# Altium PCB SchematicBKP.PcbDoc (part 1 of 2)
Units mm, origin at the board's own origin, x right, y up, seen from the top; angles counter-clockwise.
Board outline 121.41 x 45.21 mm, 2 copper layers (Top Layer, Bottom Layer); 55 components, 98 nets, 201 pads, 241 vias.
Unrouted connection lines stored in the file: 65.
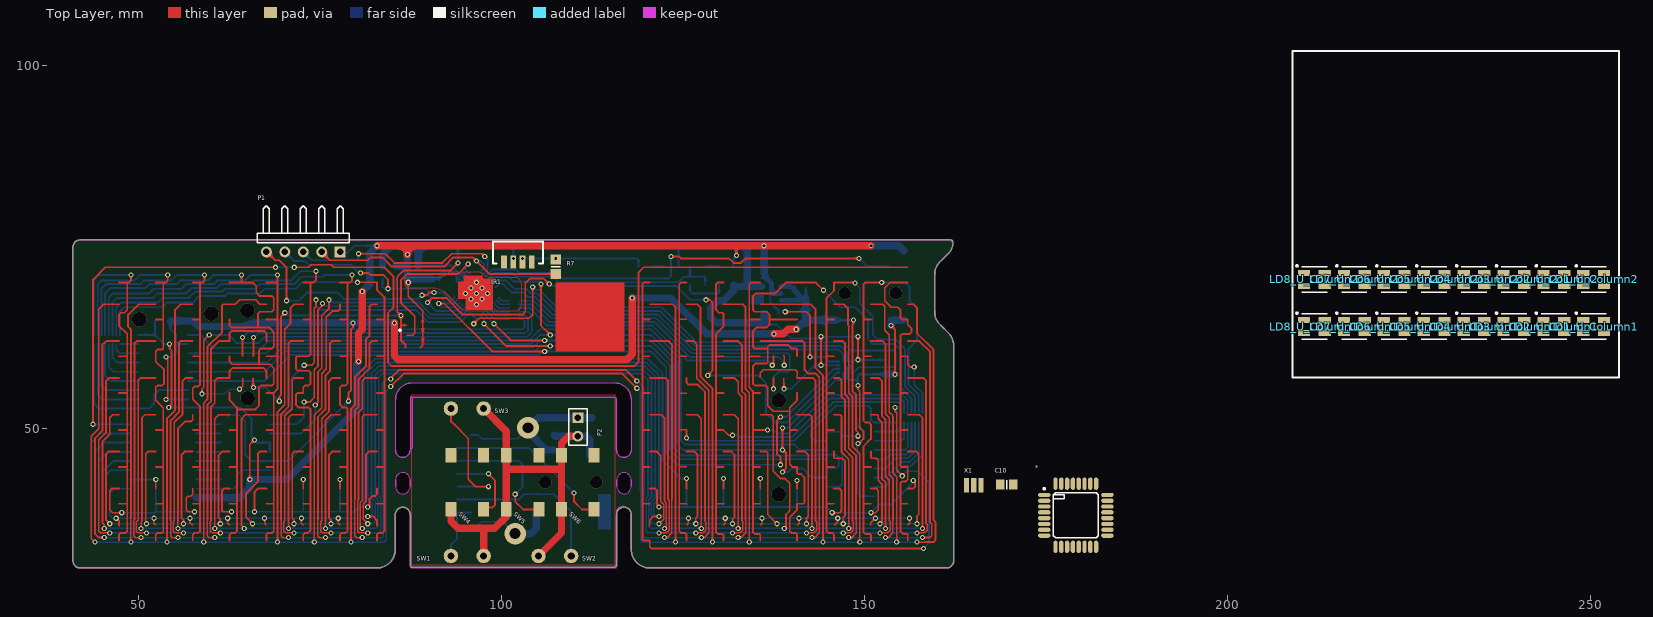
[diagram p0: Top Layer view]
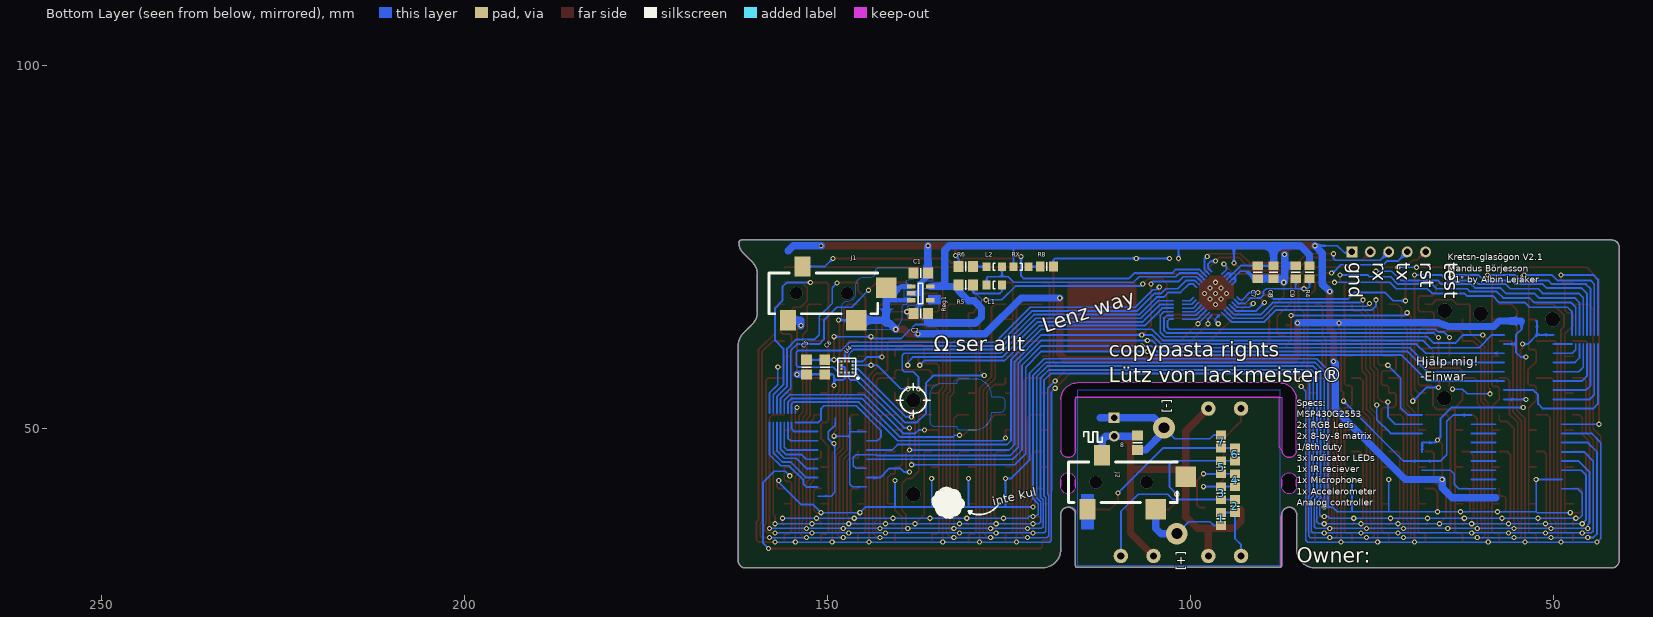
[diagram p1: Bottom Layer view, seen from below]

## Layer stack, top to bottom
Top Solder: solder mask 0.0102, Solder Resist, Dk 3.5
Top Layer: signal copper 0.0356
Dielectric 1: dielectric 0.32, FR-4, Dk 4.8
Bottom Layer: signal copper 0.0356
Bottom Solder: solder mask 0.0102, Solder Resist, Dk 3.5

## Board outline
43.434,75.946 42.672,75.946 41.91,75.946 ccw(c41.91,74.93) 40.894,74.93 40.894,31.75 ccw(c41.91,31.75) 41.91,30.734 82.804,30.734 ccw(c82.804,33.274) 85.344,33.274 85.344,34.036 85.344,38.084 cw(c86.36,38.084) 86.36,39.1 cw(c86.36,38.084) 87.376,38.084 87.376,35.56 87.376,31.099 ccw(c87.63,31.099) 87.63,30.845 115.554,30.845 ccw(c115.554,31.115) 115.824,31.115 115.824,38.1 cw(c116.832,38.1) 116.832,39.108 cw(c116.832,38.084) 117.856,38.084 117.856,37.338 117.856,33.385 117.856,33.274 ccw(c120.396,33.274) 120.396,30.734 120.65,30.734 161.29,30.734 ccw(c161.29,31.75) 162.306,31.75 162.306,61.33 ccw(c159.766,61.33) 161.562,63.126 160.578,64.111 160.399,64.29 cw(c162.195,66.086) 159.655,66.086 159.655,68.596 159.655,71.133 cw(c162.195,71.133) 160.399,72.929 160.846,73.376 161.59,74.12 ccw(c160.129,75.581) 162.195,75.581 ccw(c161.829,75.581) 161.829,75.946 161.544,75.946
cut-out: 85.364,41.97 ccw(c86.372,41.97) 87.38,41.97 87.372,42.866 ccw(c86.372,42.866) 85.371,42.866
cut-out: 85.36,46.974 85.36,53.959 cw(c87.63,53.959) 87.63,56.23 115.586,56.23 cw(c115.586,53.959) 117.856,53.959 117.856,46.974 cw(c116.84,46.974) 115.824,46.974 115.824,53.959 ccw(c115.562,53.967) 115.57,54.229 87.36,54.229 87.36,46.974 cw(c86.36,46.974)
cut-out: 115.844,41.97 ccw(c116.852,41.97) 117.86,41.97 117.852,42.866 ccw(c116.852,42.866) 115.851,42.866

## Design rules (kind name [scope] priority, off if disabled: settings)
Clearance [All] p1: gap=0.178 ignorepadtopadclearanceinfootprint=FALSE except(0: Arc-Hole Track-Hole SMDPad-Hole THPad-Hole Via-Hole Fill-Hole Poly-Hole Region-Hole Text-Hole; 0.406: Arc-Poly Track-Poly SMDPad-Poly THPad-Poly Via-Poly Fill-Poly Poly-Poly)
FanoutControl Fanout_Default [All] p1: bgadir=Out bgaviamode=Centered fanoutstyle=Auto fanoutdirection=Alternating viagrid=0.025 // Fanout_Default (Default Rule)
FanoutControl Fanout_Small [(CompPinCount < 5)] p2: bgadir=Out bgaviamode=Centered fanoutstyle=Auto fanoutdirection=OutThenIn viagrid=0.025 // Fanout_Small (Default Rule)
FanoutControl Fanout_LCC [IsLCC] p4: bgadir=Out bgaviamode=Centered fanoutstyle=Auto fanoutdirection=Alternating viagrid=0.025 // Fanout_LCC (Default Rule)
FanoutControl Fanout_BGA [IsBGA] p5: bgadir=Out bgaviamode=Centered fanoutstyle=Auto fanoutdirection=Alternating viagrid=0.025 // Fanout_BGA (Default Rule)
PolygonConnect [All] p1: connectstyle=Relief reliefconductorwidth=0.254 reliefentries=4 polygonreliefangle="90 Angle" airgapwidth=0.254
RoomDefinition U_Column8 [InComponentClass('U_Column8')] p1: confinementstyle=ConfineIn formatcopy=TRUE lockcomponents=FALSE outline 88.367,0 139.167,0 139.167,25.4 88.367,25.4
RoomDefinition U_Column7 [InComponentClass('U_Column7')] p2: confinementstyle=ConfineIn formatcopy=TRUE lockcomponents=FALSE outline 0,65.126 50.8,65.126 50.8,90.526 0,90.526
RoomDefinition U_Column6 [InComponentClass('U_Column6')] p3: confinementstyle=ConfineIn formatcopy=TRUE lockcomponents=FALSE outline 0,37.791 50.8,37.791 50.8,63.191 0,63.191
RoomDefinition U_Column5 [InComponentClass('U_Column5')] p4: confinementstyle=ConfineIn formatcopy=TRUE lockcomponents=FALSE outline 0,95.479 50.8,95.479 50.8,120.879 0,120.879
RoomDefinition U_Column4 [InComponentClass('U_Column4')] p5: confinementstyle=ConfineIn formatcopy=TRUE lockcomponents=FALSE outline 0.076,124.257 50.876,124.257 50.876,149.657 0.076,149.657
RoomDefinition U_Column3 [InComponentClass('U_Column3')] p6: confinementstyle=ConfineIn formatcopy=TRUE lockcomponents=FALSE outline 59.055,124.282 109.855,124.282 109.855,149.682 59.055,149.682
RoomDefinition U_Column2 [InComponentClass('U_Column2')] p7: confinementstyle=ConfineIn formatcopy=TRUE lockcomponents=FALSE outline 209,66.5 253.5,66.5 253.5,72.786 209,72.786
RoomDefinition U_Column1 [InComponentClass('U_Column1')] p8: confinementstyle=ConfineIn formatcopy=TRUE lockcomponents=FALSE outline 209,61.5 253.5,61.5 253.5,66.5 209,66.5
RoutingVias [All] p1: holewidth=0.4 width=0.61 viastyle="Through Hole" minholewidth=0.3 minwidth=0.457 maxholewidth=3 maxwidth=3
SilkToSilkClearance [All] p1 off: silktosilkclearance=0.254
SilkToSolderMaskClearance [IsPad] p1 off: minsilkscreentomaskgap=0.254 clearancetoexposedcopper=TRUE
SolderMaskExpansion [All] p1: expansion=0.102
Width [All] p1: maxlimit=1.016 minlimit=0.178 preferedwidth=0.254
24 further rules are at their usual default settings.

## Classes and differential pairs
component class U_Column2: LD1_U_Column2 LD2_U_Column2 LD3_U_Column2 LD4_U_Column2 LD5_U_Column2 LD6_U_Column2 LD7_U_Column2 LD8_U_Column2
component class U_Column1: LD1_U_Column1 LD2_U_Column1 LD3_U_Column1 LD4_U_Column1 LD5_U_Column1 LD6_U_Column1 LD7_U_Column1 LD8_U_Column1
component class U_Controller: 1 2 3 4 5 6 7 8 J2 P2 SW1 SW2 SW3 SW4 SW5 SW6
component class U_MSP430G2553: * C1 C2 C7 C8 C9 C10 IR1 L1 L2 P1 R4 R5 R6 R7 R8 Reg1 RX X1
component class main: Acc1 C5 C6 J1 U4
channel class Column: Col1 Col2 Col3 Col4 Col5 Col6 Col7 Col8 Col9 Col10 Col11 Col12 Col13 Col14 Col15 Col16

## Components (designator, comment, footprint, x,y, rotation, side; value= is the part's Value field where it differs from the comment)
1 "Res1" 6-0805_N 95.758,37.491 r270 bottom value=1K
2 "Res1" 6-0805_N 93.853,39.269 r270 bottom value=1K
3 "Res1" 6-0805_N 95.758,41.047 r270 bottom value=1K
4 "Res1" 6-0805_N 93.853,42.825 r270 bottom value=1K
5 "Res1" 6-0805_N 95.758,44.603 r270 bottom value=1K
6 "Res1" 6-0805_N 93.853,46.381 r90 bottom value=1K
7 "Res1" 6-0805_N 95.758,48.159 r270 bottom value=1K
8 "Res1" 6-0805_M 107.25,48 r270 bottom value=1M
* "ATmega328" TQFP32 179.121,37.998 r0 top
C1 "Cap" 6-0805_M 137.16,71.374 r0 bottom locked value=1uF
C2 "Cap" 6-0805_M 137.16,65.786 r0 bottom locked value=1uF
C5 "Cap" 6-0805_M 152.908,58.42 r90 bottom locked value=100nF
C6 "Cap" 6-0805_M 150.368,58.42 r90 bottom locked value=100nF
C7 "Cap" 6-0805_N 90.703,71.501 r270 bottom value=10uF
C8 "Cap" 6-0805_N 88.519,71.501 r270 bottom value=100nF
C9 "Cap" 6-0805_N 85.471,71.501 r270 bottom value=1nF
C10 "Cap" 6-0805_N 169.596,42.215 r0 top value=100nF
IR1 "IR Reciever" "IR smd - duplicate" 100.33,72.898 r0 top
J1 "3.5mm Jack" PHONEJACK 154.305,68.58 r180 bottom locked
J2 "3.5mm Jack" PHONEJACK 113.03,42.545 r180 bottom
L1 "150080RS75000" 0805_A 127,69.723 r180 bottom
L2 "150080RS75000" 0805_A 127,72.263 r180 bottom
LD1_U_Column1 "WS2812" WS2812B-Mini 250.5,64 r0 top (schematic designator LD1)
LD1_U_Column2 "WS2812" WS2812B-Mini 250.5,70.5 r0 top (schematic designator LD1)
LD2_U_Column1 "WS2812" WS2812B-Mini 245,64 r0 top (schematic designator LD2)
LD2_U_Column2 "WS2812" WS2812B-Mini 245,70.5 r0 top (schematic designator LD2)
LD3_U_Column1 "WS2812" WS2812B-Mini 239.5,64 r0 top (schematic designator LD3)
LD3_U_Column2 "WS2812" WS2812B-Mini 239.5,70.5 r0 top (schematic designator LD3)
LD4_U_Column1 "WS2812" WS2812B-Mini 234,64 r0 top (schematic designator LD4)
LD4_U_Column2 "WS2812" WS2812B-Mini 234,70.5 r0 top (schematic designator LD4)
LD5_U_Column1 "WS2812" WS2812B-Mini 228.5,64 r0 top (schematic designator LD5)
LD5_U_Column2 "WS2812" WS2812B-Mini 228.5,70.5 r0 top (schematic designator LD5)
LD6_U_Column1 "WS2812" WS2812B-Mini 223,64 r0 top (schematic designator LD6)
LD6_U_Column2 "WS2812" WS2812B-Mini 223,70.5 r0 top (schematic designator LD6)
LD7_U_Column1 "WS2812" WS2812B-Mini 217.5,64 r0 top (schematic designator LD7)
LD7_U_Column2 "WS2812" WS2812B-Mini 217.5,70.5 r0 top (schematic designator LD7)
LD8_U_Column1 "WS2812" WS2812B-Mini 212,64 r0 top (schematic designator LD8)
LD8_U_Column2 "WS2812" WS2812B-Mini 212,70.5 r0 top (schematic designator LD8)
P1 "Header 5H" HDR1X5H 77.724,74.295 r180 top locked
P2 "Header 2" HDR1X2 110.49,51.435 r270 top
R4 "Res1" 6-0805_N 83.566,71.501 r90 bottom value=47k
R5 "Res1" 6-0805_M 130.937,69.723 r0 bottom value=1K
R6 "Res1" 6-0805_M 130.937,72.263 r180 bottom value=1K
R7 "Res1" 6-0805_M 107.442,72.263 r270 top value=1K
R8 "Res1" 6-0805_N 119.761,72.263 r0 bottom value=1K
Reg1 "ADP122" SOP5 137.16,68.58 r180 bottom locked
RX "150080RS75000" 0805_A 123.317,72.263 r0 bottom
SW1 "Vertical switch" Btn_Vert 95.25,32.385 r0 top
SW2 "Vertical switch" Btn_Vert 107.315,32.385 r0 top
SW3 "Vertical switch" Btn_Vert 95.25,52.705 r180 top
SW4 "Horizontal button" Btn_Horiz 95.25,42.545 r270 top
SW5 "Horizontal button" Btn_Horiz 102.87,42.545 r270 top
SW6 "Horizontal button" Btn_Horiz 110.49,42.545 r270 top
U4 "BMA253" BMA253 147.32,58.42 r0 bottom locked
X1 "16MHz" osc 165.049,42.113 r0 top

## Footprints (in the part's own frame and the unit in brackets; to place one, negate y for a bottom-side part, rotate by r counter-clockwise, add the part's x,y. Pads: shape width x height; smd on the part's side, far side on the other; paste and mask are expansions set on the pad)
6-0805_M [mm] "Chip Resistor, Body 2.0x1.2mm, IPC Low Density"
  rect 1.4x1.5 smd: 1(-1,0) 2(1,0)
  silkscreen extent 0,-0.65 0,0.65, body extent -1.07,-0.7 1.07,0.7, height 0.7
6-0805_N [mm] "Chip Resistor, Body 2.0x1.2mm, IPC Medium Density"
  rect 1.2x1.4 smd: 1(-0.9,0) 2(0.9,0)
  silkscreen extent 0,-0.6 0,0.6, body extent -1.07,-0.7 1.07,0.7, height 0.7
0805_A [mm] "Chip LED, 2-Leads, Body 2.0x1.3mm, IPC Medium Density"
  rect 1.1x1.2 smd: 1(-1.05,0) 2(1.05,0)
  silkscreen extent -0.15,-0.5 0.15,0.5, body extent -1,-0.62 1,0.62, height 0.68
BMA253 [mm]
  rect 0.3x0.3 smd mask+0.051: 1(-0.75,0.75) 2(-0.75,0.25) 3(-0.75,-0.25) 4(-0.75,-0.75) 5(-0.25,-0.75) 6(0.25,-0.75) 7(0.75,-0.75) 8(0.75,-0.25) 9(0.75,0.25) 10(0.75,0.75) 11(0.25,0.75) 12(-0.25,0.75)
  silkscreen extent -1.65,-1.25 1.25,1.65, body extent -1.03,-1.03 1.03,1.03, height 1.2
Btn_Horiz [mm] "Horizontal 6x6mm SMD Button"
  rect 2x1.5 smd: 1(-3.75,2.25) 2(3.75,2.25) 3(-3.75,-2.25) 4(3.75,-2.25)
  body extent -4,-3 4,3, height 4.5
Btn_Vert [mm] "Vertical 6x6mm button"
  round 2 hole 1: 0(-2.25,0) 1(2.25,0)
  body extent -3,-3.5 3,0.75, height 6
HDR1X2 [mm] "Connector; Header; 2 Position"
  rect 1.5x1.5 hole 0.9: 1(0,0)
  round 1.5 hole 0.9: 2(2.54,0)
  silkscreen extent -1.27,-1.27 3.81,1.27
HDR1X5H [mm] "Connector; Header; 5 Position; Right Angle"
  rect 1.5x1.5 hole 0.9: 1(0,0)
  round 1.5 hole 0.9: 2(2.54,0) 3(5.08,0) 4(7.62,0) 5(10.16,0)
  silkscreen extent -1.27,-6.35 11.43,-1.27
"IR smd - duplicate" [mm] "TSOP77238TR"
  rect 0.8x1.8 smd: 1(0,0) 2(1.27,0) 3(2.54,0) 4(3.81,0)
  silkscreen extent -1.52,-0.21 5.33,2.84, body extent -1.5,-0.2 5.3,2.8, height 3.2
osc [mm]
  rrect0% 0.7x2 smd: GND(0,0) OSCI(1,0) OSCO(-1,0)
PHONEJACK [mil] "3.5mm phone jack"
  rect 88x110 smd: 1(-44,-146)
  rect 110x110 smd: 2(326,-146) 4(488,30)
  rect 87x110 smd: 3(35,146)
  silkscreen extent -148,-110 442,110, body extent -237,-167 508,166, height 200
SOP5 [mm]
  rect 1.2x0.6 smd: 1(-1.31,0.95) 2(-1.31,0) 3(-1.31,-0.95) 4(1.31,-0.95) 5(1.31,0.95)
  silkscreen extent -0.3,-1.43 0.3,1.43
TQFP32 [mm] "CQFP, 32-Leads, Body 9,00x9,00mm, Pitch 0,80mm, IPC Low Density"
  oval 1.7x0.6 smd: 1(-4.35,2.8) 2(-4.35,2) 3(-4.35,1.2) 4(-4.35,0.4) 5(-4.35,-0.4) 6(-4.35,-1.2) 7(-4.35,-2) 8(-4.35,-2.8) 17(4.35,-2.8) 18(4.35,-2) 19(4.35,-1.2) 20(4.35,-0.4) 21(4.35,0.4) 22(4.35,1.2) 23(4.35,2) 24(4.35,2.8)
  oval 0.6x1.7 smd: 9(-2.8,-4.35) 10(-2,-4.35) 11(-1.2,-4.35) 12(-0.4,-4.35) 13(0.4,-4.35) 14(1.2,-4.35) 15(2,-4.35) 16(2.8,-4.35) 25(2.8,4.35) 26(2,4.35) 27(1.2,4.35) 28(0.4,4.35) 29(-0.4,4.35) 30(-1.2,4.35) 31(-2,4.35) 32(-2.8,4.35)
  silkscreen extent -4.47,-3.1 3.1,3.77, body extent -4.62,-4.62 4.62,4.62, height 1.15
WS2812B-Mini [mm]
  rect 1.7x0.85 smd: 1(-1.425,0.89) 2(-1.425,-0.89) 3(1.425,-0.89) 4(1.425,0.89)
  silkscreen extent -2.52,-1.75 1.75,1.99, body extent -1.96,-1.74 1.96,1.74, height 1.95

## Part data
1 2 3 4 5 6 7 8 R4 R5 R6 R7 R8: "Resistor", LatestRevisionDate=17-Jul-2002, LatestRevisionNote="Re-released for DXP Platform.", PackageDescription="Axial Device, Thru-Hole; 2 Leads; 0.3 in Pin Spacing", PackageReference=AXIAL-0.3, Published=8-Jun-2000, Publisher="Altium Limited"
C1 C2 C5 C6 C7 C8 C9 C10: "Capacitor", LatestRevisionDate=17-Jul-2002, LatestRevisionNote="Re-released for DXP Platform.", PackageDescription="Radial Cap, Thru-Hole; 2 Leads; 0.3 in Pin Spacing", PackageReference=RAD-0.3, Published=8-Jun-2000, Publisher="Altium Limited"
IR1: library part Component_1, "38kHz Infrared reciever module", manufacturer part nr=TSOP77238TR, Supplier Part Number 1=78-TSOP77238TR, Supplier 1=Mouser
J1 J2: library part Phonejack
L1 L2 RX: "SMD mono-color Chip LED, WL-SMCW, Red", Color=Red, ComponentLink1Description="Manufacturer URL", ComponentLink1URL=http://www.we-online.com, ComponentLink2Description=Datasheet, ComponentLink2URL=http://katalog.we-online.com/led/datasheet/150080RS75000.pdf, PackageReference=0805_A, PartNumber=150080RS75000
P1: "Header, 5-Pin, Right Angle", LatestRevisionDate=17-Jul-2002, LatestRevisionNote="Re-released for DXP Platform.", Publisher="Altium Limited"
P2: "Header, 2-Pin", LatestRevisionDate=17-Jul-2002, LatestRevisionNote="Re-released for DXP Platform.", Publisher="Altium Limited"
Reg1: library part REG, "LD59030DTPU33R 3.3V regulator"
SW1 SW2 SW3: library part SWVERT
SW4 SW5 SW6: library part HORIZBTN
U4: library part ACCELEROMETER, "accelerometer"
X1: library part xtal_1, "CSTCE16M0V53-R0"

## Via types
v1: diameter 0.711, hole 0.4, Top Layer to Bottom Layer, 189 vias
v2: diameter 0.711, hole 0.4, Top Layer to Bottom Layer, tented bottom, 28 vias
v3: diameter 0.711, hole 0.4, Top Layer to Bottom Layer, tented top, 10 vias
v4: diameter 2, hole 2, Top Layer to Bottom Layer, 6 vias
v5: diameter 1.702, hole 1.702, Top Layer to Bottom Layer, 4 vias
v6: diameter 3, hole 1.5, Top Layer to Bottom Layer, 2 vias
v7: diameter 0.711, hole 0.4, Top Layer to Bottom Layer, tented both sides, 1 vias
v8: diameter 0.61, hole 0.4, Top Layer to Bottom Layer, 1 vias

## Nets (pads, with @x,y where several pads share a name; then routed paths per layer and width w, separated by ;. In a path a pad name is that pad's centre, name@x,y a point inside that pad or via, vN(x,y) a via of type N, cw(c..) or ccw(c..) an arc to the next point about the centre after c; other vN are vias at no path point)
3.3V: C2.1 C5.2 C6.2 IR1.2 Reg1.5 U4.3 U4.7 | length 188.1
  Top Layer w0.178: 138.883,56.87 v2(138.883,55.427) v2@138.938,55.372
  Top Layer w0.254: 65.732,56.87 65.732,55.68 v1(65.786,55.626) ; v1(69.342,53.721) 69.342,54.356 69.596,54.61 69.596,65.405 v1(70.104,65.913) ; 86.757,61.087 86.757,61.452 86.106,62.103 86.106,64.135 ; 86.919,64.186 86.157,64.186 86.106,64.135 ; v1(93.98,72.771) 92.964,71.755 86.487,71.755 85.598,70.866 85.598,66.04 v1(86.106,65.532) 86.106,64.135 ; IR1.2@101.6,72.898 IR1.2@101.6,73.463 ; v1(144.018,58.674) v1(144.018,62.611) ; v1(149.098,59.436) v1(149.098,62.611)
  Bottom Layer w0.254: v1(65.786,55.626) 67.437,55.626 v1(69.342,53.721) ; v1(70.104,65.913) 70.485,65.532 v1(86.106,65.532) ; 90.703,72.401 93.053,72.401 94.361,71.093 ; v1(93.98,72.771) 93.98,75.149 ; 94.947,70.507 94.361,71.093 ; 95.3,70.86 94.787,71.374 94.642,71.374 94.361,71.093 ; v1(101.6,73.406) 101.6,75.133 101.608,75.141 101.6,75.149 ; 124.367,72.263 124.367,75.115 ; C2.1@136.16,65.786 136.16,64.576 136.449,64.287 137.897,64.287 139.827,62.357 143.764,62.357 v1(144.018,62.611) v1(149.098,62.611) ; v2(138.883,55.427) 139.882,55.427 143.125,58.67 v1@143.891,58.67 ; v1(144.018,58.674) 143.895,58.674 v1@143.891,58.67 ; U4.3@146.57,58.67 v1@143.891,58.67 ; U4.7@148.07,59.17 148.451,59.17 148.701,59.42 v1@149.098,59.42 ; v1(149.098,59.436) v1@149.098,59.42 ; C5.2@152.908,59.42 C6.2@150.368,59.42 v1@149.098,59.42
  Bottom Layer w0.356: 88.519,72.401 90.703,72.401
  Bottom Layer w1.016: 83.566,72.401 83.566,73.914 84.801,75.149 93.98,75.149 101.6,75.149 133.223,75.149 133.858,74.514 133.858,69.85 134.178,69.53 ; 88.519,72.401 88.519,75.149 ; Reg1.5@135.85,69.53 134.178,69.53 ; C2.1@136.16,65.786 136.16,64.516 129.54,64.516 128.778,65.278 128.778,66.548 129.794,67.564 130.556,67.564 131.937,68.945 131.937,69.723 132.13,69.53 134.178,69.53
5V: C1.2 J1.2 J1.4 Reg1.1 Reg1.3 | length 209.7
  Top Layer w0.254: v1(53.721,53.975) 53.975,54.229 53.975,59.563 v1(53.721,59.817) ; v2(78.867,53.721) 78.867,54.864 79.248,55.245 79.248,63.627 79.502,63.881 v1(79.502,64.516) ; v1(148.463,64.897) 148.463,64.389 148.336,64.262 148.336,55.118 148.844,54.61 148.844,49.657 149.098,49.403 v1(149.098,48.895)
  Top Layer w1.016: v1(85.217,64.516) 85.217,59.944 85.725,59.436 117.221,59.436 117.983,60.198 v1(117.983,67.945) ; v1(137.541,62.992) 138.811,62.992 139.446,63.627 v1(140.589,63.627)
  Bottom Layer w0.178: 144.555,41.91 146.558,41.91 146.939,42.291 146.939,48.895 ; 144.555,49.53 146.939,49.53 ; 146.955,51.435 146.955,49.546 146.939,49.53 ; v1(149.098,48.895) 146.939,48.895 ; 146.939,48.895 146.939,49.53
  Bottom Layer w0.254: v1(53.721,53.975) 56.74,53.975 ; v1(53.721,59.817) 54.483,59.817 55.118,60.452 55.118,61.595 ; 54.34,64.77 54.34,63.643 55.118,62.865 55.118,61.595 ; 56.74,61.595 55.118,61.595 ; 61.243,51.816 63.754,51.816 64.643,50.927 64.643,46.355 65.532,45.466 68.043,45.466 70.612,45.466 v2(78.867,53.721) ; 141.91,67.818 J1.4@141.91,69.342 ; J1.2@146.025,64.897 146.05,64.897 v1(148.463,64.897)
  Bottom Layer w0.66: Reg1.3@138.47,67.63 141.722,67.63 ; Reg1.1@138.47,69.53 139.822,69.53 141.722,67.63 ; 141.91,67.818 141.722,67.63
  Bottom Layer w1.016: 54.34,64.77 57.404,64.77 58.166,64.008 64.389,64.008 65.087,64.262 65.786,64.516 v1(79.502,64.516) v1(85.217,64.516) ; v1(117.983,67.945) 123.317,67.945 128.27,62.992 v1(137.541,62.992) ; v1(140.589,63.627) 141.402,64.44 141.91,64.44 ; 141.91,67.818 141.91,64.44 ; J1.2@146.05,64.897 J1.2@146.025,64.872 142.342,64.872 141.91,64.44
+5: *.4 *.6 C7.1 C8.1 LD1_U_Column1.1 LD1_U_Column2.1 LD2_U_Column1.1 LD2_U_Column2.1 LD3_U_Column1.1 LD3_U_Column2.1 LD4_U_Column1.1 LD4_U_Column2.1 LD5_U_Column1.1 LD5_U_Column2.1 LD6_U_Column1.1 LD6_U_Column2.1 LD7_U_Column1.1 LD7_U_Column2.1 LD8_U_Column1.1 LD8_U_Column2.1 R4.2 R5.2 RX.2
A_BTN: *.23 J1.3 | length 60.5
  Top Layer w0.254: v1(123.317,73.66) 124.46,73.66 124.714,73.406 131.318,73.406 131.953,72.771 132.969,72.771 133.604,73.406 v1(149.225,73.406)
  Bottom Layer w0.254: 97.74,70.86 98.761,71.882 101.981,71.882 102.489,71.374 107.696,71.374 108.458,70.612 122.936,70.612 123.317,70.993 v1(123.317,73.66) ; v1(149.225,73.406) 150.343,72.288 J1.3@153.416,72.288
BAT+: 1.2 J2.2 | length 12.9
  Bottom Layer w0.254: 1.2@95.758,36.591 96.763,36.591 97.282,37.11 100.203,37.11 v6(101.854,35.459)
  Bottom Layer w1.016: v6(101.854,35.459) 104.039,35.459 104.75,36.17 J2.2@104.75,38.837
BAT-: 7.1 8.2 J2.1 P2.1 | length 23.3
  Bottom Layer w0.254: 7.1@95.758,49.059 96.763,49.059 97.282,48.54 102.108,48.54 v6(103.632,50.064)
  Bottom Layer w1.016: 8.2@107.25,47 106.129,47 103.632,49.497 v6(103.632,50.064) 105.003,51.435 P2.1@110.49,51.435 112.395,51.435
CLK: U4.12 | length 136.9
  Top Layer w0.254: v3(105.41,69.85) 105.41,64.135 v3(106.68,62.865) ; v1(138.684,43.942) 139.192,44.45 139.192,46.609 138.811,46.99 v1(138.684,46.99) v1(138.684,50.038)
  Bottom Layer w0.254: 56.74,60.325 67.564,60.325 68.834,61.595 104.013,61.595 105.283,62.865 v3(106.68,62.865) 120.523,62.865 124.206,59.182 124.206,47.752 124.968,46.99 v1(138.684,46.99) ; 98.447,70.153 99.16,70.866 100.965,70.866 101.6,70.231 105.156,70.231 105.537,69.85 v3(105.41,69.85) ; v1(138.684,43.942) 139.446,43.942 139.954,44.45 141.478,44.45 142.748,43.18 144.555,43.18 ; v1(138.684,50.038) 139.446,50.038 146.05,56.642 146.812,56.642 147.07,56.9 U4.12@147.07,57.67
CS_ACCL: U4.10 | length 76.2
  Top Layer w0.254: v3(96.139,64.389) 96.901,65.151 103.759,65.151 104.267,65.659 v3(104.267,69.469)
  Bottom Layer w0.178: U4.10@148.07,57.67 148.475,57.67 149.225,58.42 154.051,58.42
  Bottom Layer w0.254: 96.007,65.592 96.52,65.08 96.52,64.77 v3(96.139,64.389) ; v3(104.267,69.469) 104.648,69.088 105.156,69.088 107.569,66.675 122.047,66.675 126.873,61.849 146.939,61.849 148.082,60.706 154.051,60.706 154.305,60.452 154.305,58.674 154.051,58.42
GND: *.3 *.5 *.21 C1.1 C2.2 C5.1 C6.1 C7.2 C8.2 C9.1 C10.2 IR1.1 J1.1 LD1_U_Column1.3 LD1_U_Column2.3 LD2_U_Column1.3 LD2_U_Column2.3 LD3_U_Column1.3 LD3_U_Column2.3 LD4_U_Column1.3 LD4_U_Column2.3 LD5_U_Column1.3 LD5_U_Column2.3 LD6_U_Column1.3 LD6_U_Column2.3 LD7_U_Column1.3 LD7_U_Column2.3 LD8_U_Column1.3 LD8_U_Column2.3 P1.1 R6.1 Reg1.2 U4.4 U4.8 U4.9 U4.11 X1.GND | length 267
  Top Layer w0.254: v1(54.102,52.832) 54.483,53.213 54.483,60.706 54.229,60.96 v1(54.229,61.595) ; v1(65.278,42.926) 65.278,47.752 v1(65.913,48.387) ; v1(87.122,70.104) 87.122,68.199 89.103,66.218 89.103,64.186 89.103,62.814 89.103,61.433 88.757,61.087 ; v1(132.334,73.787) 132.334,75.149 ; v1(139.065,66.04) 141.986,66.04 142.494,65.532 v1(142.494,59.817) ; v1(149.098,47.879) 149.225,47.879 149.86,48.514 149.86,49.555 149.352,50.063 149.352,55.118 149.098,55.372 v1(149.098,55.88) ; v1(153.67,64.135) 154.178,63.627 v1(154.178,57.404)
  Top Layer w1.016: v1(80.264,59.182) 80.264,63.119 80.772,63.627 v1(80.772,68.834) ; v1(82.804,75.149) 86.995,75.149 ; v1(86.995,73.914) 86.995,75.149 ; v8(150.876,75.149) v1(136.144,75.149) 132.334,75.149 86.995,75.149
  Bottom Layer w0.178: 148.955,51.435 148.955,50.435 149.86,49.53 149.86,48.514 149.225,47.879 v1(149.098,47.879) ; v1@148.971,47.752 148.971,41.148 149.479,40.64 151.355,40.64
  Bottom Layer w0.254: 49.94,62.865 52.212,62.865 ; 52.34,64.77 52.212,64.77 52.212,62.865 ; v1(54.102,52.832) 64.008,52.832 65.532,51.308 65.532,48.768 v1(65.913,48.387) 66.294,48.006 68.043,48.006 68.043,46.736 ; v1(54.229,61.595) 53.482,61.595 52.212,62.865 ; P1.1@77.724,74.168 78.74,74.168 79.721,75.149 v1(82.804,75.149) ; C7.2@90.424,70.601 C7.2@91.175,70.601 ; 92.126,71.476 92.278,71.628 93.118,71.628 93.98,70.766 ; 94.24,69.8 93.726,70.313 93.726,70.512 93.98,70.766 ; 94.593,70.153 93.98,70.766 ; R6.1@131.937,72.263 131.937,73.39 v1(132.334,73.787) ; C1.1@136.16,70.977 C1.1@136.16,71.374 ; 137.16,68.58 136.998,68.418 136.998,67.345 138.16,66.183 C2.2@138.16,65.786 ; v1(142.494,59.817) 144.526,59.817 145.173,59.17 U4.4@146.57,59.17 ; U4.9@148.07,58.17 148.07,58.42 ; U4.8@148.07,58.67 148.07,58.42 ; v1(149.098,55.88) 149.098,56.642 ; C5.1@152.908,57.42 C6.1@150.368,57.42 149.241,57.42 149.098,57.277 149.098,56.642 ; v1@154.162,57.42 v1(154.178,57.404) ; 148.07,58.42 148.066,58.416 147.57,58.416 U4.11@147.57,57.67 147.57,56.9 147.828,56.642 149.098,56.642
  Bottom Layer w0.508: C7.2@91.175,70.601 92.05,71.476 92.126,71.476
  Bottom Layer w0.66: C1.1@136.16,70.977 137.16,69.977 137.16,68.58 Reg1.2@138.47,68.58
  Bottom Layer w1.016: 57.89,40.386 63.881,40.386 65.278,41.783 v1(65.278,42.926) 68.043,42.926 70.358,42.926 80.01,52.578 80.01,58.928 v1(80.264,59.182) ; v1(80.772,68.834) 81.788,69.85 81.788,74.133 v1(82.804,75.149) ; C9.1@85.471,72.401 86.984,72.401 ; v1@86.995,70.358 v1(86.995,73.914) ; v1@87.071,70.155 v1(87.122,70.104) ; 87.238,70.601 C8.2@88.519,70.601 C7.2@90.424,70.601 ; v1(136.144,75.149) 136.144,75.057 136.16,75.041 C1.1@136.16,71.374 ; v8(150.876,75.149) 154.721,75.149 155.423,74.447 ; C5.1@152.908,57.42 v1@154.162,57.42 ; v1(153.67,64.135) 153.67,64.872 J1.1@155.423,64.872
INDICATOR: L1.1 L2.2 | length 33.6
  Bottom Layer w0.254: 98.093,70.507 98.96,71.374 101.473,71.374 101.981,70.866 107.061,70.866 107.823,70.104 124.333,70.104 125.095,70.866 125.95,70.866 ; L2.2@125.95,72.263 125.95,70.866 ; L1.1@128.05,69.723 128.05,70.705 127.889,70.866 125.95,70.866
IR_RX: IR1.3 R7.1 R8.1 | length 17.2
  Top Layer w0.254: R7.1@107.442,73.263 v1(107.442,73.406)
  Bottom Layer w0.254: v1(102.866,73.406) 102.866,73.349 102.87,73.346 102.93,73.406 v1(107.442,73.406) 118.618,73.406 118.861,73.163 R8.1@118.861,72.263
MISO: U4.1 | length 88.3
  Top Layer w0.254: v1(89.789,67.31) 90.424,67.945 92.329,67.945 94.615,65.659 102.87,65.659 103.251,66.04 103.251,69.977 103.886,70.612 105.791,70.612 v3(106.553,69.85) ; v1(128.143,67.691) 128.651,67.691 129.032,67.31 129.032,57.912 v1(128.397,57.277)
  Bottom Layer w0.254: v1(89.789,67.31) 90.932,66.167 93.753,66.167 94.593,67.007 ; v3(106.553,69.85) 106.807,69.596 124.079,69.596 125.984,67.691 v1(128.143,67.691) ; v1(128.397,57.277) 135.382,57.277 136.398,56.261 136.398,52.07 137.668,50.8 139.319,50.8 146.189,57.67 U4.1@146.57,57.67
MOSI: U4.2 | length 135.5
  Top Layer w0.254: v1(91.313,67.183) 92.075,67.183 98.679,60.579 v3(105.918,60.579) ; v1(138.43,44.958) 138.43,45.974 137.922,46.482 137.922,51.054 v2(138.43,51.562)
  Bottom Layer w0.254: 56.74,56.515 67.31,56.515 70.866,60.071 105.029,60.071 105.537,60.579 v3(105.918,60.579) 120.523,60.579 122.682,58.42 122.682,46.482 124.206,44.958 v1(138.43,44.958) ; v1(91.313,67.183) 91.821,66.675 93.554,66.675 94.24,67.36 ; v2(138.43,51.562) 139.192,51.562 145.8,58.17 U4.2@146.57,58.17
Net1_1: 1.1 2.2 SW1.0 | length 8.3
  Bottom Layer w0.254: SW1.0@93,32.385 93,33.945 93.853,34.798 2.2@93.853,38.369 93.875,38.391 1.1@95.758,38.391
Net2_1: 2.1 3.2 SW2.1 | length 23.1
  Bottom Layer w0.254: 2.1@93.853,40.169 3.2@95.736,40.169 ; 3.2@95.758,40.147 102.377,40.147 103.124,40.894 107.188,40.894 109.565,38.517 SW2.1@109.565,32.385
Net3_1: 3.1 4.2 SW3.1 | length 18.3
  Top Layer w0.254: SW3.1@93,52.705 93,50.953 93.508,50.445 95.377,48.576 95.377,42.952 96.393,41.936 v1(98.171,41.936)
  Bottom Layer w0.254: 4.2@93.875,41.947 3.1@95.758,41.947 98.16,41.947 v1(98.171,41.936)
Net4_1: 4.1 5.2 SW4.2 | length 10.2
  Top Layer w0.254: SW4.2@98.008,39.075 98.765,39.075 99.06,39.37 99.06,42.825 v1(98.171,43.714)
  Bottom Layer w0.254: 4.1@93.853,43.725 5.2@95.736,43.725 ; 5.2@95.758,43.703 98.055,43.703 98.044,43.714 v1(98.171,43.714)
Net5_1: 5.1 6.1 SW5.2 | length 18.4
  Top Layer w0.254: v1(101.854,40.894) 101.854,39.878 102.937,38.795 SW5.2@105.12,38.795
  Bottom Layer w0.254: 6.1@93.875,45.503 5.1@95.758,45.503 102.325,45.503 102.87,44.958 102.87,41.91 v1(101.854,40.894)
Net6_2: 6.2 7.2 SW6.2 | length 23.7
  Top Layer w0.254: v1(109.982,41.047) 109.982,39.878 111.065,38.795 112.968,38.795 SW6.2@113.248,39.075
  Bottom Layer w0.254: 6.2@93.853,47.281 7.2@95.736,47.281 ; 7.2@95.758,47.259 103.77,47.259 v1(109.982,41.047)
Net*_7: *.7 X1.OSCO
Net*_8: *.8 X1.OSCI
Net*_20: *.20 C10.1
NetL1_2: L1.2 R5.1 | length 6
  Bottom Layer w0.254: L1.2@125.95,69.723 125.95,68.868 126.238,68.58 129.794,68.58 129.937,68.723 R5.1@129.937,69.723
NetL2_1: L2.1 R6.2 | length 1.9
  Bottom Layer w0.254: L2.1@128.05,72.263 R6.2@129.937,72.263
NetLD1_U_Column1_2: LD1_U_Column1.2 LD2_U_Column1.4
NetLD1_U_Column1_4: LD1_U_Column1.4 LD8_U_Column2.2
NetLD1_U_Column2_2: LD1_U_Column2.2 LD2_U_Column2.4
NetLD1_U_Column2_4: LD1_U_Column2.4
NetLD1_U_Column3_2: 
NetLD1_U_Column3_4: 
NetLD1_U_Column4_2: 
NetLD1_U_Column4_4: 
NetLD1_U_Column5_2: 
NetLD1_U_Column5_4: 
NetLD1_U_Column6_2: 
NetLD1_U_Column6_4: 
NetLD1_U_Column7_2: 
NetLD1_U_Column7_4: 
NetLD1_U_Column8_2: 
NetLD1_U_Column8_4: 
NetLD2_U_Column1_2: LD2_U_Column1.2 LD3_U_Column1.4
NetLD2_U_Column2_2: LD2_U_Column2.2 LD3_U_Column2.4
NetLD2_U_Column3_2: 
NetLD2_U_Column4_2: 
NetLD2_U_Column5_2: 
NetLD2_U_Column6_2: 
NetLD2_U_Column7_2: 
NetLD2_U_Column8_2: 
NetLD3_U_Column1_2: LD3_U_Column1.2 LD4_U_Column1.4
NetLD3_U_Column2_2: LD3_U_Column2.2 LD4_U_Column2.4
NetLD3_U_Column3_2: 
NetLD3_U_Column4_2: 
NetLD3_U_Column5_2: 
NetLD3_U_Column6_2: 
NetLD3_U_Column7_2: 
NetLD3_U_Column8_2: 
NetLD4_U_Column1_2: LD4_U_Column1.2 LD5_U_Column1.4
NetLD4_U_Column2_2: LD4_U_Column2.2 LD5_U_Column2.4
NetLD4_U_Column3_2: 
NetLD4_U_Column4_2: 
NetLD4_U_Column5_2: 
NetLD4_U_Column6_2: 
NetLD4_U_Column7_2: 
NetLD4_U_Column8_2: 
NetLD5_U_Column1_2: LD5_U_Column1.2 LD6_U_Column1.4
NetLD5_U_Column2_2: LD5_U_Column2.2 LD6_U_Column2.4
NetLD5_U_Column3_2: 
NetLD5_U_Column4_2: 
NetLD5_U_Column5_2: 
NetLD5_U_Column6_2: 
NetLD5_U_Column7_2: 
NetLD5_U_Column8_2: 
NetLD6_U_Column1_2: LD6_U_Column1.2 LD7_U_Column1.4
NetLD6_U_Column2_2: LD6_U_Column2.2 LD7_U_Column2.4
NetLD6_U_Column3_2: 
NetLD6_U_Column4_2: 
NetLD6_U_Column5_2: 
NetLD6_U_Column6_2: 
NetLD6_U_Column7_2: 
NetLD6_U_Column8_2: 
NetLD7_U_Column1_2: LD7_U_Column1.2 LD8_U_Column1.4
NetLD7_U_Column2_2: LD7_U_Column2.2 LD8_U_Column2.4
NetLD7_U_Column3_2: 
NetLD7_U_Column4_2: 
NetLD7_U_Column5_2: 
NetLD7_U_Column6_2: 
NetLD7_U_Column7_2: 
NetLD7_U_Column8_2: 
NetLD8_U_Column1_2: LD8_U_Column1.2
NetR8_2: R8.2 RX.1 | length 1.6
  Bottom Layer w0.254: R8.2@120.661,72.263 RX.1@122.267,72.263
NetU4_5: U4.5 | length 53.1
  Bottom Layer w0.254: 99.154,69.446 99.558,69.85 100.203,69.85 101.346,68.707 102.997,68.707 103.632,68.072 104.648,68.072 107.061,65.659 121.539,65.659 126.365,60.833 146.458,60.833 147.07,60.221 U4.5@147.07,59.17
NetU4_6: U4.6 | length 54.4
  Bottom Layer w0.254: 98.8,69.8 99.359,70.358 100.584,70.358 101.727,69.215 103.378,69.215 104.013,68.58 104.902,68.58 107.315,66.167 121.793,66.167 126.619,61.341 146.685,61.341 147.57,60.456 U4.6@147.57,59.17
REG_TH: Reg1.4
RST: *.29 C9.2 P1.4 R4.1 | length 31.2
  Top Layer w0.254: v1(80.518,71.374) 81.661,71.374 81.915,71.12 83.693,71.12 84.328,70.485 v1(84.328,69.215)
  Bottom Layer w0.254: P1.4@70.104,74.295 71.374,73.025 72.898,73.025 73.406,72.517 79.248,72.517 80.391,71.374 v1(80.518,71.374) ; R4.1@83.566,70.601 83.566,69.469 83.82,69.215 v1(84.328,69.215) 89.535,69.215 89.916,68.834 89.916,68.326 90.297,67.945 91.694,67.945 92.456,67.183 93.355,67.183 93.886,67.714 ; 85.471,69.342 C9.2@85.471,70.601
SIGNAL: 8.1 J2.3 P2.2 SW1.1 SW2.0 SW3.0 SW4.4 SW5.3 SW5.4 SW6.3 SW6.4 | length 64.2
  Top Layer w1.016: SW4.4@93,38.795 93,37.175 93.98,36.195 97.79,36.195 ; SW1.1@97.5,32.385 97.5,35.905 97.79,36.195 ; SW3.0@97.5,52.705 100.62,49.585 SW5.3@100.62,46.295 SW5.4@100.62,38.795 100.62,37.81 99.005,36.195 97.79,36.195 ; 101.128,44.349 108.24,44.349 ; SW2.0@105.065,32.385 108.24,35.56 SW6.4@108.24,38.795 ; SW6.4@108.494,39.049 108.24,39.303 108.24,44.349 ; P2.2@110.49,48.895 109.22,48.895 108.24,47.915 SW6.3@108.24,46.295 108.24,44.349
  Bottom Layer w1.016: 8.1@107.25,49 107.355,48.895 P2.2@110.49,48.895 111.633,48.895 112.141,48.387 J2.3@112.141,46.253
TEST: P1.5 | length 33.2
  Top Layer w0.254: P1.5@67.564,74.295 67.643,74.295 68.786,73.152 69.342,73.152 70.358,72.136 v1(70.358,67.564) ; v1(89.027,68.326) 89.662,68.326 90.043,68.707 v7(90.678,68.707)
  Bottom Layer w0.254: v1(70.358,67.564) 72.009,67.564 73.124,68.679 77.371,68.679 78.232,67.818 88.519,67.818 v1(89.027,68.326) ; v7(90.678,68.707) 91.785,68.707 92.801,67.691 93.156,67.691 93.532,68.067
UART_RX: *.30 P1.2 R7.2 | length 38
  Top Layer w0.254: P1.2@75.184,74.549 P1.2@75.184,74.295 76.327,73.152 81.534,73.152 81.915,73.533 83.566,73.533 84.836,72.263 92.075,72.263 93.345,73.533 96.012,73.533 96.774,72.771 ; v1(96.52,73.025) 96.774,72.771 ; R7.2@107.442,71.263 98.282,71.263 96.774,72.771
  Bottom Layer w0.254: v1(96.52,73.025) 97.155,73.025 97.536,72.644 97.536,72.071 97.033,71.568
UART_TX: *.31 P1.3 | length 30.3
  Top Layer w0.254: v1(80.264,74.041) 83.947,74.041 85.217,72.771 91.821,72.771 93.091,74.041 97.282,74.041 v1(97.663,73.66)
  Bottom Layer w0.254: P1.3@72.644,74.295 73.787,73.152 80.01,73.152 80.264,73.406 v1(80.264,74.041) ; 97.386,71.214 98.044,71.872 98.044,73.279 v1(97.663,73.66)
pads on no net: *.1 *.2 *.9 *.10 *.11 *.12 *.13 *.14 *.15 *.16 *.17 *.18 *.19 *.22 *.24 *.25 *.26 *.27 *.28 *.32 IR1.4 J2.4 SW4.1 SW4.3 SW5.1 SW6.1